# Altium PCB CC2530-Board.PcbDoc
Units mil, origin at the board's own origin, x right, y up, seen from the top; angles counter-clockwise.
Board outline 2808 x 1974 mil, 2 copper layers (Top Layer, Bottom Layer); 45 components, 38 nets, 167 pads, 25 vias.
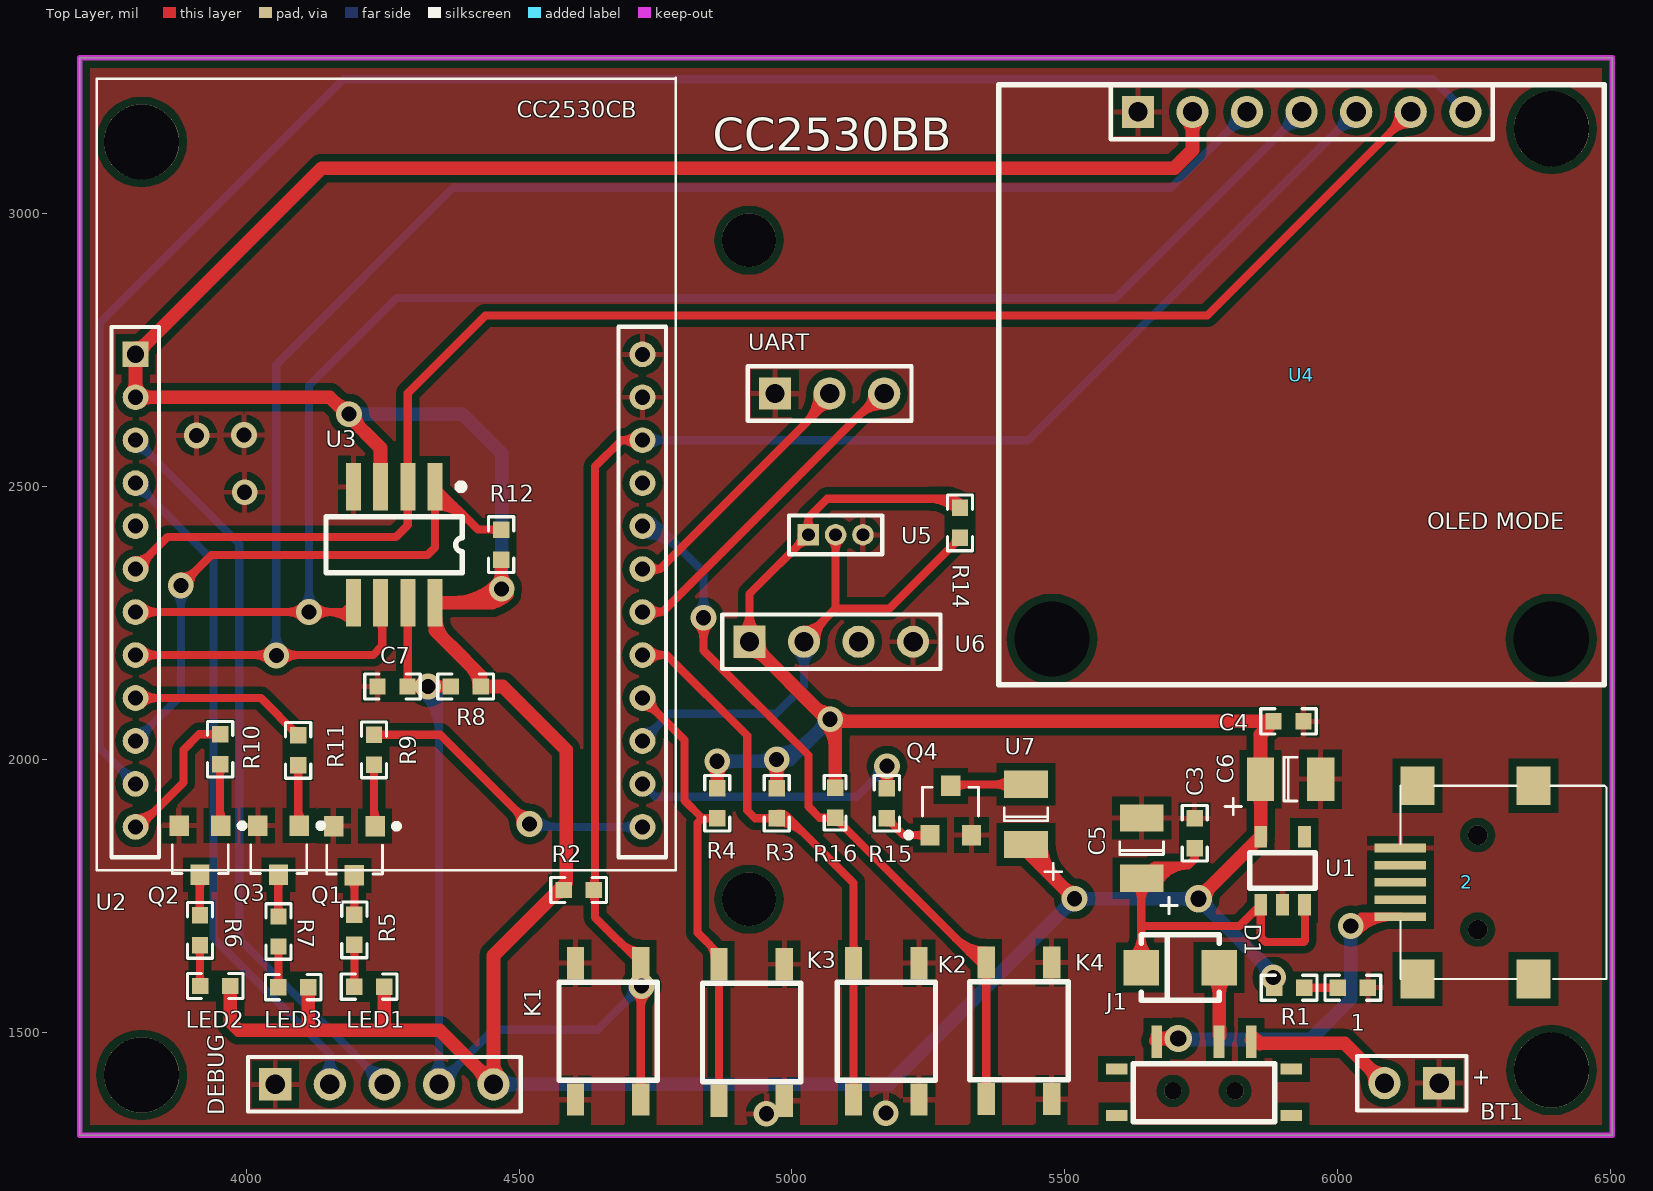
[diagram p0: Top Layer view]
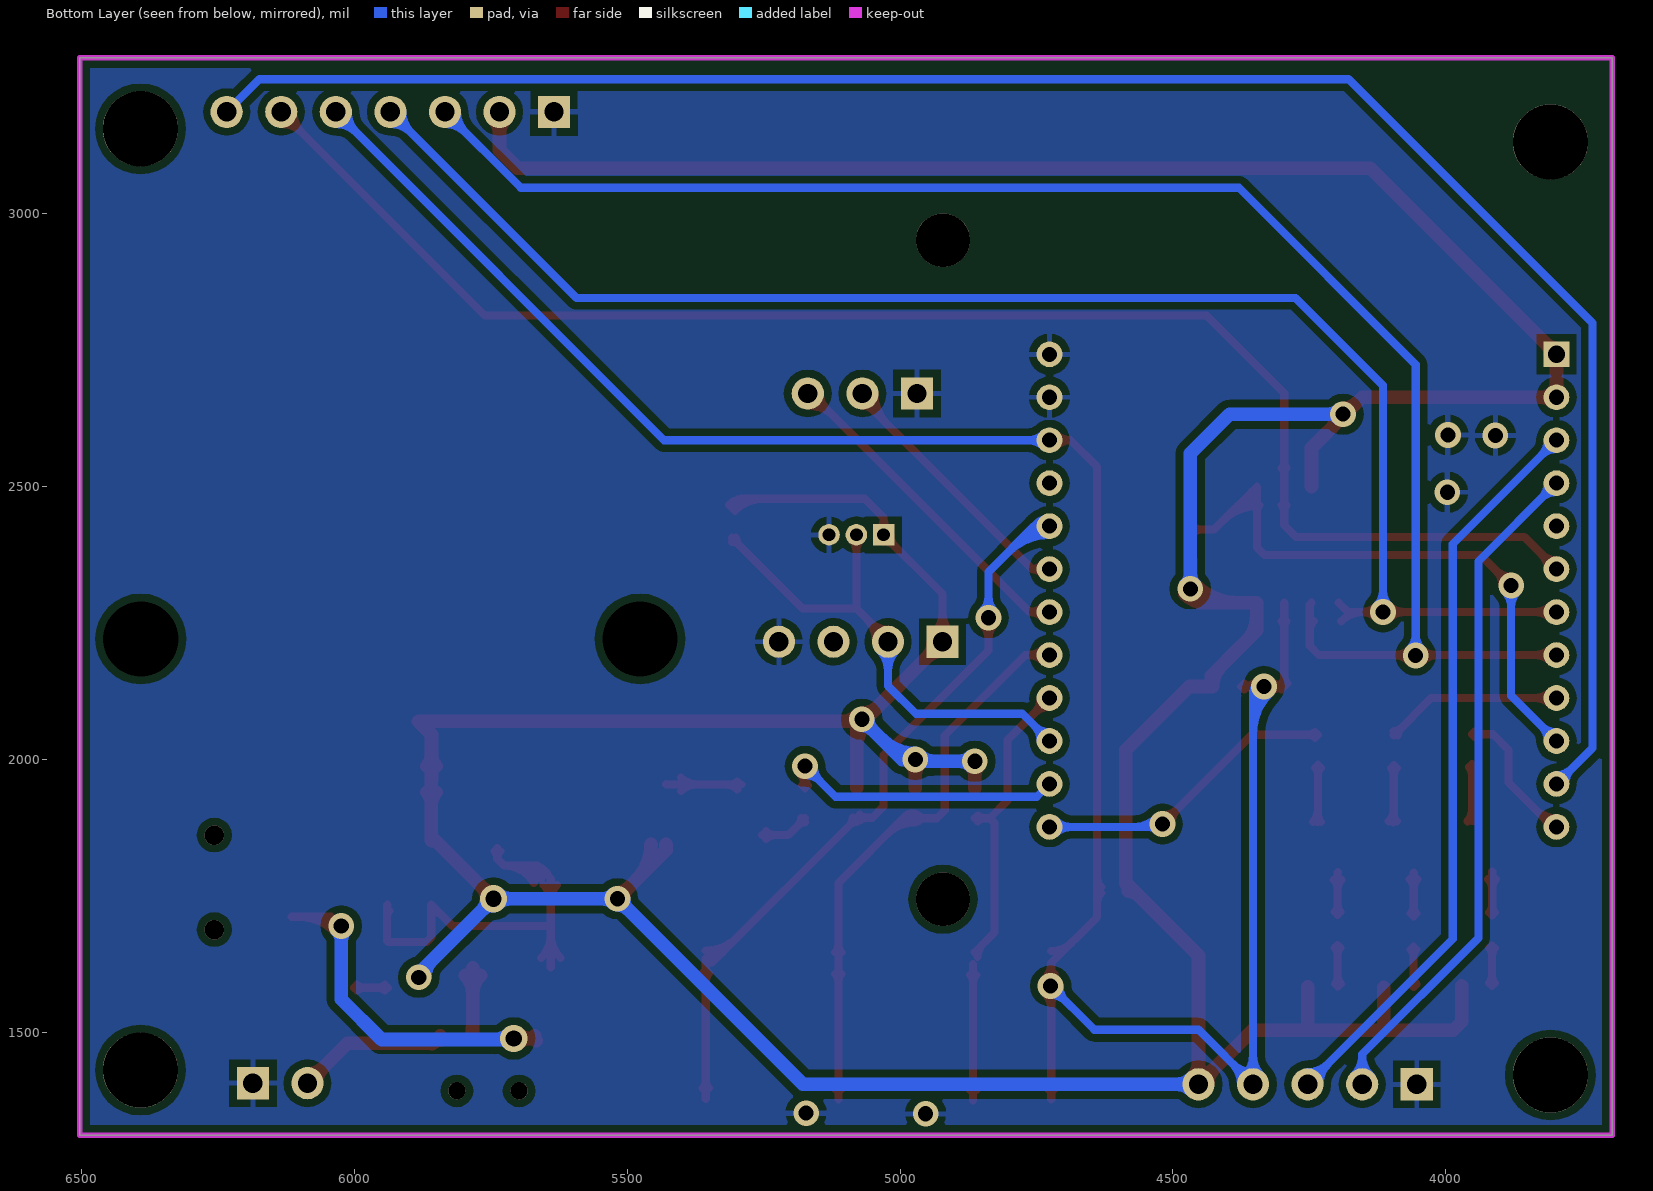
[diagram p1: Bottom Layer view, seen from below]

## Layer stack, top to bottom
Top Layer: signal copper 1.4
Dielectric: dielectric 12.6, FR-4, Dk 4.8
Bottom Layer: signal copper 1.4

## Board outline
3695,3286 3695,1312 6503,1312 6503,3286 3695,3286

## Design rules (kind name [scope] priority, off if disabled: settings)
Clearance Polygon [InPolygon] p1: gap=13.78
Clearance 3.3V [InNamedPolygon ('3V3')] p2: gap=19.68
Clearance [All] p3: gap=9.84
ComponentClearance [All] p1 off: gap=10 collisioncheckmode=3 verticalgap=100000 showdistances=FALSE
HoleToHoleClearance [All] p1: gap=1 allowstackedmicrovias=TRUE
MinimumSolderMaskSliver [All] p1: minsoldermaskwidth=1
PolygonConnect GND [IsVia] p1: connectstyle=Relief reliefconductorwidth=10 reliefentries=4 polygonreliefangle="90 Angle"
PolygonConnect [All] p2: connectstyle=Relief reliefconductorwidth=10 reliefentries=4 polygonreliefangle="90 Angle"
RoutingVias [All] p1: holewidth=28 width=50 viastyle="Through Hole" minholewidth=15.75 minwidth=39.37 maxholewidth=31.5 maxwidth=59.06
SilkToSilkClearance [All] p1: silktosilkclearance=1
SilkscreenOverComponentPads [All] p1: minsilkscreentomaskgap=0
SolderMaskExpansion [All] p1: expansion=4
TestPointUsage [All] p1: valid=0 allowmultiple=FALSE
Testpoint [All] p1: side=15 testpointundercomponent=TRUE minsize=40 maxsize=100 preferedsize=60 minholesize=0 maxholesize=40 preferedholesize=32 testpointgrid=1 style=1023 order=0123456789
Width [All] p1: maxlimit=50 minlimit=10 preferedwidth=10
19 further rules are at their usual default settings.

## Components (designator, comment, footprint, x,y, rotation, side; value= is the part's Value field where it differs from the comment)
1 "LED_SMD" 0603#1 6003,1582 r0 top
2 "USB" MINI-USB 6322,1777 r270 top
BT1 "4.5V" BAT-2 6136,1407 r180 top
C3 "" 0603#1 5738,1890 r270 top
C4 "" 0603#1 5935,2070 r180 top
C5 "10uF" C-1210 5648,1845 r0 top
C6 "10uF" C-1210 5921,1957 r270 top
C7 "" 0603#1 4243,2134 r0 top
D1 "SS14" SS14 5769,1622 r180 top
DEBUG "" HDR1X5 4053,1405 r0 top (schematic designator U9)
J1 "Header 3" Key-7Pin 5885,1443 r180 top
K1 "Mini-Key" MINI-KEY 4651,1521 r0 top
K2 "Mini-Key" MINI-KEY 5185,1483 r180 top
K3 "Mini-Key" MINI-KEY 4938,1481 r180 top
K4 "Mini-Key" MINI-KEY 5428,1484 r180 top
LED1 "LED_SMD" 0603#1 4250,1584 r180 top
LED2 "LED_SMD" 0603#1 3968,1585 r180 top
LED3 "LED_SMD" 0603#1 4111,1583 r180 top
Q1 "NPN_SMD" SOT23-3 4235,1878 r180 top
Q2 "NPN_SMD" SOT23-3 3952,1879 r180 top
Q3 "NPN_SMD" SOT23-3 4096,1879 r180 top
Q4 "NPN_SMD" SOT23-3 5254,1861.74 r0 top
R1 "" 0603#1 5936,1582 r180 top
R2 "" 0603#1 4634,1761 r180 top
R3 "" 0603#1 4972,1895 r90 top
R4 "" 0603#1 4863,1895 r90 top
R5 "" 0603#1 4198,1713 r270 top
R6 "" 0603#1 3915,1712 r270 top
R7 "" 0603#1 4059,1710 r270 top
R8 "" 0603#1 4377,2134 r0 top
R9 "" 0603#1 4234,2043 r270 top
R10 "" 0603#1 3952,2044 r270 top
R11 "" 0603#1 4095,2042 r270 top
R12 "" 0603#1 4467,2419 r270 top
R14 "" 0603#1 5308,2409 r90 top
R15 "" 0603#1 5174,1895 r90 top
R16 "" 0603#2 5055,1911 r0 top
U1 "LDO" SOT23-5 5869,1709 r90 top
U2 "CC2530CB" CC2530CB 3801,2747 r0 top
U3 "M25PE20" M25PE20 4393,2501 r270 top
U4 "OLED" OLED-0.96 5634,3187 r0 top
U5 "DS18B20" MHDR1X3 5030,2412 r0 top
U6 "DHT11" HDR1X4 4922,2216 r0 top
U7 "LIGHT" C-1210 5436,1907 r0 top
UART "Header 3" HDR1X3 4969,2671 r0 top

## Footprints (in the part's own frame and the unit in brackets; to place one, negate y for a bottom-side part, rotate by r counter-clockwise, add the part's x,y. Pads: shape width x height; smd on the part's side, far side on the other; paste and mask are expansions set on the pad)
0603#1 [mil]
  rect 30x30 smd: 1(-2.5,0) 2(52.5,0)
  silkscreen extent -26,-23 76,23
0603#2 [mil]
  rect 30x30 smd: 1(24,-17.5) 2(24,37.5)
  silkscreen extent 4,-40 44,60
BAT-2 [mm] "Multicell Battery; 2 Leads"
  rect 1.5x1.5 hole 0.9: 1(-1.27,0)
  round 1.5 hole 0.9: 2(1.27,0)
  silkscreen extent -2.54,-1.27 2.54,1.27
C-1210 [mil]
  rect 80x50 smd: 1(-7.13,-62.41) 2(-7.13,47.83)
  silkscreen extent -47,-127 58,5
CC2530CB [mm]
  rect 1.2x1.2 hole 0.8: 1(-0.102,-0.107)
  round 1.2 hole 0.7: 2(-0.102,-2.107) 3(-0.102,-4.107) 4(-0.102,-6.107) 5(-0.102,-8.107) 6(-0.102,-10.107) 7(-0.102,-12.107) 8(-0.102,-14.107) 9(-0.102,-16.107) 10(-0.102,-18.107) 11(-0.102,-20.107) 12(-0.102,-22.107) 13(23.495,-22.107) 14(23.495,-20.107) 15(23.495,-18.107) 16(23.495,-16.107) 17(23.495,-14.107) 18(23.495,-12.107) 19(23.495,-10.107) 20(23.495,-8.107) 21(23.495,-6.107) 22(23.495,-4.107) 23(23.495,-2.107) 24(23.495,-0.107)
  silkscreen extent -1.91,-24.13 25.04,12.75
HDR1X3 [mm] "Connector; Header; 3 Position"
  rect 1.5x1.5 hole 0.9: 1(0,0)
  round 1.5 hole 0.9: 2(2.54,0) 3(5.08,0)
  silkscreen extent -1.27,-1.27 6.35,1.27
HDR1X4 [mm] "Connector; Header; 4 Position"
  rect 1.5x1.5 hole 0.9: 1(0,0)
  round 1.5 hole 0.9: 2(2.54,0) 3(5.08,0) 4(7.62,0)
  silkscreen extent -1.27,-1.27 8.89,1.27
HDR1X5 [mm] "Connector; Header; 5 Position"
  rect 1.5x1.5 hole 0.9: 1(0,0)
  round 1.5 hole 0.9: 2(2.54,0) 3(5.08,0) 4(7.62,0) 5(10.16,0)
  silkscreen extent -1.27,-1.27 11.43,1.27
Key-7Pin [mm]
  rect 1x0.5 smd: 0(-0.762,2.413) 0(-0.762,0.254) 0(7.366,0.254) 0(7.366,2.413)
  round 0.8 hole 0.8: 0(1.85,1.27) 0(4.75,1.27)
  rect 0.5x1.5 smd: 1(1.1,-1.016) 2(2.6,-1.016) 3(5.5,-1.016)
  silkscreen extent 0,0 6.6,2.7
M25PE20 [mm]
  rect 2.2x0.7 smd: 1(0.025,-1.194) 2(0.025,-2.464) 3(0.025,-3.734) 4(0.025,-5.004) 5(5.425,-5.004) 6(5.425,-3.734) 7(5.425,-2.464) 8(5.425,-1.194)
  silkscreen extent -0.12,-6.27 4.03,0.16
MHDR1X3 [mm] "Connector; Header; 3 Position"
  rect 1x1 hole 0.6: 1(0,0)
  round 1 hole 0.6: 2(1.27,0) 3(2.54,0)
  silkscreen extent -0.9,-0.9 3.44,0.9
MINI-KEY [mil]
  rect 31.5x59.06 smd: 1(72,-144) 1(72,106) 2(-48,-144) 2(-48,106)
  silkscreen extent -78,-109 102,71
MINI-USB [mm]
  rect 0.4x2.4 smd: 1(1.651,-5.259) 2(0.851,-5.259) 3(0.051,-5.259) 4(-0.749,-5.259) 5(-1.549,-5.259)
  rect 1.8x1.6 smd: 6(-4.449,-4.459) 7(-4.449,0.941) 8(4.551,0.941) 9(4.551,-4.459)
  silkscreen extent -4.45,-5.26 4.55,4.34
OLED-0.96 [mm]
  round 0 hole 3.5: 0(-4,-24.53) 0(19.24,-24.53)
  rect 1.5x1.5 hole 0.9: 1(0,0)
  round 1.5 hole 0.9: 2(2.54,0) 3(5.08,0) 4(7.62,0) 5(10.16,0) 6(12.7,0) 7(15.24,0)
  silkscreen extent -6.48,-26.67 21.72,1.27
SOT23-3 [mm]
  rect 0.9x0.95 smd mask+0.102: 1(-0.025,0) 2(1.905,0) 3(0.94,2.286)
  silkscreen extent -1.15,-0.12 2.23,2.22
SOT23-5 [mm]
  rect 1x0.6 smd: 1(0.635,0.254) 2(0.635,-0.762) 3(0.635,-1.778) 4(3.81,-1.778) 5(3.81,0.254)
  silkscreen extent 1.4,-2.29 3.05,0.76
SS14 [mil]
  rect 65x65 smd: 1(-13.94,3.15) 2(129.06,3.15)
  silkscreen extent -14,-57 129,63

## Part data
1 LED1 LED2 LED3: library part LED_0805
2: library part Mini_USB
BT1: library part Battery, "Multicell Battery"
C3 C4 C7: library part C_0805
C5 C6 U7: library part "Cap Pol", "Polarized Capacitor (Radial)"
D1: library part Diode, "Default Diode"
DEBUG: library part "Header 5", "Header, 5-Pin"
J1 UART: "Header, 3-Pin"
Q1 Q2 Q3 Q4: "NPN Bipolar Transistor"
R1 R2 R3 R4 R5 R6 R7 R8 R9 R10 R11 R12 R14 R15 R16: library part R_0805
U1: library part LDO-3.3
U2: library part "Header 12X2A", "Header, 12-Pin, Dual row"
U4: library part "Header 7", "Header, 7-Pin"
U5: library part MHDR1X3, "Header, 3-Pin"
U6: library part "Header 4", "Header, 4-Pin"

## Free pads (board coordinates)
  round 137.8 hole 137.8 unplated: 0(3808,1422) 0(3808,3132) 0(6392,1431) 0(6392,3156)
  round 98.43 hole 98.43 unplated: 0(4921.26,1744.09) 0(4921.26,2952)

## Via types
v1: diameter 47.24, hole 27.56, Top Layer to Bottom Layer, 21 vias
v2: diameter 35.43, hole 35.43, Top Layer to Bottom Layer, 2 vias
v3: diameter 50, hole 30, Top Layer to Bottom Layer, 2 vias

## Nets (pads, with @x,y where several pads share a name; then routed paths per layer and width w, separated by ;. In a path a pad name is that pad's centre, name@x,y a point inside that pad or via, vN(x,y) a via of type N, cw(c..) or ccw(c..) an arc to the next point about the centre after c; other vN are vias at no path point)
3.3V: C4.2 C6.1 DEBUG.5 LED1.1 LED2.1 LED3.1 R1.2 R2.2 R3.2 R4.2 R8.2 R12.2 R14.2 R16.2 U1.5 U2.1 U2.2 U3.3 U3.8 U4.2 U5.1 U6.1 U7.1 | length 13953.4
  Top Layer w15: U6.1 4922,2304 U5.1 ; U5.1@5031.5,2413.5 U5.1 ; R14.2 5291.5,2478 5064,2478 5030,2444 U5.1 ; 4922,2269.18 cw(c4868.82,2269.18) 4906.42,2231.58 ccw(c4868.82,2269.18) 4922,2269.18 ; 4922,2269.18 ccw(c4975.18,2269.18) 4937.58,2231.58 cw(c4975.18,2269.18) 4922,2269.18 ; 5009.2,2391.2 cw(c5030,2370.4) 5030,2399.82 ccw(c5030,2370.4) 5009.2,2391.2 ; 5009.2,2391.2 ccw(c4988.4,2412) 5017.81,2412 cw(c4988.4,2412) 5009.2,2391.2 ; 5030,2441.42 cw(c5000.58,2441.42) 5021.38,2420.62 ccw(c5000.58,2441.42) 5030,2441.42 ; 5030,2441.42 ccw(c5059.42,2441.42) 5038.62,2420.62 cw(c5059.42,2441.42) 5030,2441.42 ; R14.2@5295.2,2474.3 cw(c5282.39,2461.5) 5300.5,2461.5 ccw(c5282.39,2461.5) R14.2@5295.2,2474.3 ; R14.2@5295.2,2474.3 ccw(c5308,2487.11) 5308,2469 cw(c5308,2487.11) R14.2@5295.2,2474.3 ; 5250.06,2478 cw(c5250.06,2403.56) 5302.7,2456.2 ccw(c5250.06,2403.56) 5250.06,2478 ; 5286.27,2478 cw(c5286.27,2439.77) 5313.3,2466.8 ccw(c5286.27,2439.77) 5286.27,2478
  Top Layer w25: LED2.1 3970.5,1519.5 3986,1504 4111,1504 ; 4112.5,1505.5 4111,1504 ; LED3.1 4113.5,1506.5 4111,1504 ; U3.3 4246,2571 4186,2631 4152.94,2664.06 U2.2 U2.1 4138.2,3084 5701,3084 5734,3117 U4.2 ; LED1.1 4252.5,1505.5 4251,1504 ; 4374,2209 4429.5,2153.5 ; R12.2 4467,2303.54 4450.86,2287.4 U3.8 4346,2237 4429.5,2153.5 ; 4584.5,2019.5 4551,2053 ; R4.2 v1(4863,1997) ; U6.1 v1@5068,2070 ; R3.2 v1(4972,2000) ; R16.2 5079,2059 v1@5068,2070 ; U7.1 5428.87,1834.13 v1(5518,1745) ; v3(5745,1745) U1.5 5859,1963.72 C6.1 5858.59,2046.09 C4.2 v1@5068,2070 ; 3797,2690.91 cw(c3770.15,2690.91) 3789.14,2671.93 ccw(c3770.15,2690.91) 3797,2690.91 ; 3797,2690.91 ccw(c3823.85,2690.91) U2.2@3804.86,2671.93 ; 3797,2690.91 ccw(c3823.85,2690.91) U2.2@3804.86,2671.93 ; 3797,2715.95 cw(c3823.85,2715.95) 3804.86,2734.94 ccw(c3823.85,2715.95) 3797,2715.95 ; 3797,2715.95 ccw(c3770.15,2715.95) 3789.14,2734.94 cw(c3770.15,2715.95) 3797,2715.95 ; U2.2@3804.86,2671.93 ccw(c3823.85,2690.91) 3823.85,2664.06 ; U2.2@3804.86,2671.93 ccw(c3823.85,2690.91) 3823.85,2664.06 ; U2.1@3815.99,2761.79 cw(c3797,2780.78) 3797,2753.93 ccw(c3797,2780.78) U2.1@3815.99,2761.79 ; U2.1@3815.99,2761.79 ccw(c3834.97,2742.8) 3808.12,2742.8 cw(c3834.97,2742.8) U2.1@3815.99,2761.79 ; 3823.85,2664.06 ccw(c3823.85,2637.21) 3804.86,2656.2 cw(c3823.85,2637.21) 3823.85,2664.06 ; 4111,1504 4251,1504 ; 4251,1504 4354,1504 DEBUG.5 4453,1641 4586,1774 4586,2018 4551,2053 ; 4411.44,2171.56 cw(c4373.89,2134) R8.2@4427,2134 ; 4411.44,2171.56 cw(c4373.89,2134) R8.2@4427,2134 ; 4411.44,2171.56 cw(c4373.89,2134) R8.2@4427,2134 ; 4411.44,2171.56 cw(c4373.89,2134) R8.2@4427,2134 ; 4423.93,1434.07 cw(c4394.86,1405) 4435.97,1405 ccw(c4394.86,1405) 4423.93,1434.07 ; 4423.93,1434.07 ccw(c4453,1463.14) 4453,1422.03 cw(c4453,1463.14) 4423.93,1434.07 ; 4429.5,2153.5 R8.2 4470,2134 4551,2053 ; 4453,1446.11 cw(c4411.89,1446.11) 4440.96,1417.04 ccw(c4411.89,1446.11) 4453,1446.11 ; 4453,1446.11 ccw(c4494.11,1446.11) 4465.04,1417.04 cw(c4494.11,1446.11) 4453,1446.11 ; v1@4460.14,2320.86 cw(c4379.35,2401.65) 4379.35,2287.4 ccw(c4379.35,2401.65) v1@4460.14,2320.86 ; v1@4460.14,2320.86 ccw(c4443.56,2337.44) 4467,2337.44 cw(c4443.56,2337.44) v1@4460.14,2320.86 ; 4863,1970.15 cw(c4889.85,1970.15) 4870.86,1989.14 ccw(c4889.85,1970.15) 4863,1970.15 ; 4863,1970.15 ccw(c4836.15,1970.15) 4855.14,1989.14 cw(c4836.15,1970.15) 4863,1970.15 ; U6.1@4951.07,2186.93 cw(c4980.14,2216) 4939.03,2216 ccw(c4980.14,2216) U6.1@4951.07,2186.93 ; U6.1@4951.07,2186.93 ccw(c4922,2157.86) 4922,2198.97 cw(c4922,2157.86) U6.1@4951.07,2186.93 ; 4972,1973.15 cw(c4998.85,1973.15) 4979.86,1992.14 ccw(c4998.85,1973.15) 4972,1973.15 ; 4972,1973.15 ccw(c4945.15,1973.15) 4964.14,1992.14 cw(c4945.15,1973.15) 4972,1973.15 ; 5499.01,1763.99 cw(c5480.03,1745) 5506.88,1745 ccw(c5480.03,1745) 5499.01,1763.99 ; 5499.01,1763.99 ccw(c5518,1782.97) 5518,1756.12 cw(c5518,1782.97) 5499.01,1763.99 ; 5734,3145.89 cw(c5775.11,3145.89) 5746.04,3174.96 ccw(c5775.11,3145.89) 5734,3145.89 ; 5734,3145.89 ccw(c5692.89,3145.89) 5721.96,3174.96 cw(c5692.89,3145.89) 5734,3145.89 ; 5766.34,1766.34 cw(c5745,1787.68) 5745,1757.5 ccw(c5745,1787.68) 5766.34,1766.34 ; 5766.34,1766.34 ccw(c5787.68,1745) 5757.5,1745 cw(c5787.68,1745) 5766.34,1766.34 ; 5858.59,2009.3 cw(c5828.42,2009.3) 5849.76,1987.96 ccw(c5828.42,2009.3) 5858.59,2009.3 ; 5858.59,2009.3 ccw(c5888.77,2009.3) 5867.43,1987.96 cw(c5888.77,2009.3) 5858.59,2009.3 ; 4162.19,2654.81 ccw(c4188,2680.63) 4188,2644.12 cw(c4188,2680.63) 4162.19,2654.81 ; v1@4199.12,2633 ccw(c4235.63,2633) 4209.81,2607.19 cw(c4235.63,2633) v1@4199.12,2633 ; U3.8@4347.28,2257.87 ccw(c4400.76,2257.87) 4362.94,2220.06 cw(c4400.76,2257.87) U3.8@4347.28,2257.87 ; 4439.71,2287.4 ccw(c4439.71,2341.29) 4477.81,2303.19 cw(c4439.71,2341.29) 4439.71,2287.4 ; 4467,2342.27 ccw(c4497.27,2342.27) 4475.86,2320.86 cw(c4497.27,2342.27) 4467,2342.27 ; 4562.72,1750.72 cw(c4581.5,1731.94) 4581.5,1758.5 ccw(c4581.5,1731.94) 4562.72,1750.72 ; R2.2@4579.73,1762.77 ccw(c4564.6,1777.9) 4586,1777.9 cw(c4564.6,1777.9) R2.2@4579.73,1762.77 ; 5040.77,2097.23 ccw(c5070,2126.46) 5070,2085.12 cw(c5070,2126.46) 5040.77,2097.23 ; v1@5062.14,2066.14 cw(c5021.42,2025.42) 5079,2025.42 ccw(c5021.42,2025.42) v1@5062.14,2066.14 ; v1@5077.86,2081.86 ccw(c5106.51,2110.51) 5106.51,2070 cw(c5106.51,2110.51) v1@5077.86,2081.86 ; U7.1@5456.37,1844.59 ccw(c5548.04,1844.59) 5483.22,1779.78 cw(c5548.04,1844.59) U7.1@5456.37,1844.59 ; 5846.73,1846.73 cw(c5859,1834.47) 5859,1851.82 ccw(c5859,1834.47) 5846.73,1846.73 ; C6.1@5849.76,1940.29 cw(c5827.44,1917.97) 5859,1917.97 ccw(c5827.44,1917.97) C6.1@5849.76,1940.29 ; 5859,1919.93 cw(c5887.79,1919.93) 5867.43,1940.29 ccw(c5887.79,1919.93) 5859,1919.93
  Bottom Layer w25: v1(4188,2633) 4396,2633 4468,2561 v1(4468,2313) ; DEBUG.5 5178,1405 v1(5518,1745) v3(5745,1745) 5882,1608 v1(5882,1601) v1@5882,1596 ; v1(4863,1997) 4969,1997 v1(4972,2000) 4996,2000 v1(5070,2074) ; 4214.85,2633 cw(c4214.85,2659.85) 4195.86,2640.86 ccw(c4214.85,2659.85) 4214.85,2633 ; 4214.85,2633 ccw(c4214.85,2606.15) 4195.86,2625.14 cw(c4214.85,2606.15) 4214.85,2633 ; 4468,2339.85 cw(c4441.15,2339.85) 4460.14,2320.86 ccw(c4441.15,2339.85) 4468,2339.85 ; 4468,2339.85 ccw(c4494.85,2339.85) 4475.86,2320.86 cw(c4494.85,2339.85) 4468,2339.85 ; 4494.11,1405 cw(c4494.11,1446.11) 4465.04,1417.04 ccw(c4494.11,1446.11) 4494.11,1405 ; 4494.11,1405 ccw(c4494.11,1363.89) 4465.04,1392.96 cw(c4494.11,1363.89) 4494.11,1405 ; 4889.85,1997 cw(c4889.85,2023.85) 4870.86,2004.86 ccw(c4889.85,2023.85) 4889.85,1997 ; 4889.85,1997 ccw(c4889.85,1970.15) 4870.86,1989.14 cw(c4889.85,1970.15) 4889.85,1997 ; 5051.01,2055.01 cw(c5070,2036.03) 5070,2062.88 ccw(c5070,2036.03) 5051.01,2055.01 ; 5051.01,2055.01 ccw(c5032.03,2074) 5058.88,2074 cw(c5032.03,2074) 5051.01,2055.01 ; 5499.01,1726.01 cw(c5518,1707.03) 5518,1733.88 ccw(c5518,1707.03) 5499.01,1726.01 ; 5499.01,1726.01 ccw(c5480.03,1745) 5506.88,1745 cw(c5480.03,1745) 5499.01,1726.01 ; 5544.85,1745 cw(c5544.85,1771.85) 5525.86,1752.86 ccw(c5544.85,1771.85) 5544.85,1745 ; 5544.85,1745 ccw(c5544.85,1718.15) 5525.86,1737.14 cw(c5544.85,1718.15) 5544.85,1745 ; 5714.82,1745 cw(c5714.82,1714.82) 5736.16,1736.16 ccw(c5714.82,1714.82) 5714.82,1745 ; 5714.82,1745 ccw(c5714.82,1775.18) 5736.16,1753.84 cw(c5714.82,1775.18) 5714.82,1745 ; 5766.34,1723.66 cw(c5787.68,1745) 5757.5,1745 ccw(c5787.68,1745) 5766.34,1723.66 ; 5766.34,1723.66 ccw(c5745,1702.32) 5745,1732.5 cw(c5745,1702.32) 5766.34,1723.66 ; 4937.91,1997 ccw(c4937.91,2034.09) 4964.14,2007.86 cw(c4937.91,2034.09) 4937.91,1997 ; v1@4972,2011.12 ccw(c4972,2095.91) 5031.96,2035.96 cw(c4972,2095.91) v1@4972,2011.12 ; 5858.06,1631.94 cw(c5827.13,1601) 5870.88,1601 ccw(c5827.13,1601) 5858.06,1631.94
GND: 1.2 2.5 BT1.1 C3.1 C4.1 C5.2 C6.2 C7.1 DEBUG.1 K1.2 K2.2 K3.2 K4.2 Q1.2 Q2.2 Q3.2 Q4.2 U1.2 U2.23 U2.24 U3.4 U4.1 U5.3 U6.4 UART.1
  other v1: 4953,1351 5172,1352 3997,2490 3909,2594 3996,2595
Net1_1: 1.1 R1.1 | length 175.8
  Top Layer w15: R1.1 1.1 ; 5956.61,1582 cw(c5956.61,1600.11) 5943.8,1587.3 ccw(c5956.61,1600.11) 5956.61,1582 ; 5956.61,1582 ccw(c5956.61,1563.89) 5943.8,1576.7 cw(c5956.61,1563.89) 5956.61,1582 ; 5982.39,1582 cw(c5982.39,1563.89) 5995.2,1576.7 ccw(c5982.39,1563.89) 5982.39,1582 ; 5982.39,1582 ccw(c5982.39,1600.11) 5995.2,1587.3 cw(c5982.39,1600.11) 5982.39,1582
Net2_1: 2.1 J1.3 | length 1165.5
  Top Layer w15: v1@6025,1694 6043.01,1712.01 2.1 ; v1@6024.79,1694.21 cw(c6067.77,1651.23) 6067.77,1712.01 ccw(c6067.77,1651.23) v1@6024.79,1694.21 ; v1@6035.4,1683.6 cw(c6103.98,1615.02) 6103.98,1712.01 ccw(c6103.98,1615.02) v1@6035.4,1683.6
  Top Layer w25: J1.3@5669.46,1494 5674.46,1489 v3(5708,1489) ; J1.3@5677.82,1489 cw(c5677.82,1458.82) 5699.16,1480.16 ccw(c5677.82,1458.82) J1.3@5677.82,1489 ; J1.3@5677.82,1489 ccw(c5677.82,1519.18) 5699.16,1497.84 cw(c5677.82,1519.18) J1.3@5677.82,1489 ; J1.3@5666.59,1484.88 cw(c5676.53,1474.93) 5676.53,1489 ccw(c5676.53,1474.93) J1.3@5666.59,1484.88
  Bottom Layer w25: v3@5710,1499 5722,1487 5950,1487 6024,1561 v1(6024,1695) ; 6024,1668.15 cw(c6050.85,1668.15) 6031.86,1687.14 ccw(c6050.85,1668.15) 6024,1668.15 ; 6024,1668.15 ccw(c5997.15,1668.15) 6016.14,1687.14 cw(c5997.15,1668.15) 6024,1668.15 ; v3@5716.84,1480.16 cw(c5733.35,1463.65) 5733.35,1487 ccw(c5733.35,1463.65) v3@5716.84,1480.16 ; v3@5716.84,1497.84 ccw(c5743.01,1524.01) 5743.01,1487 cw(c5743.01,1524.01) v3@5716.84,1497.84
NetBT1_2: BT1.2 J1.1 | length 443.9
  Top Layer w25: J1.1@5842.69,1494 5856.69,1480 6013,1480 BT1.2 ; 6056.93,1436.07 cw(c6027.86,1407) 6068.97,1407 ccw(c6027.86,1407) 6056.93,1436.07 ; 6056.93,1436.07 ccw(c6086,1465.14) 6086,1424.03 cw(c6086,1465.14) 6056.93,1436.07 ; J1.1@5841.69,1485.66 cw(c5841.69,1463.1) 5857.64,1479.05 ccw(c5841.69,1463.1) J1.1@5841.69,1485.66
NetC3_2: C3.2 C5.1 D1.2 U1.1 U1.3 | length 1496.2
  Top Layer w15: D1.2 5639.94,1695 ; C3.2 5738,1818 5726,1806 ; U1.3 5940,1733 5940,1668 5938,1666 5868,1666 5859,1675 U1.1 5820,1695 5639.94,1695 ; 5639.94,1679.21 cw(c5579.59,1679.21) 5622.27,1636.53 ccw(c5579.59,1679.21) 5639.94,1679.21 ; 5639.94,1679.21 ccw(c5700.3,1679.21) 5657.62,1636.53 cw(c5700.3,1679.21) 5639.94,1679.21 ; 5639.94,1695 5639.94,1781.67 C5.1 5664.28,1806 5726,1806 ; 5726,1806 ccw(c5726,1742.94) 5671.11,1773.98 cw(c5726,1742.94) 5726,1806 ; 5738,1819.39 cw(c5756.11,1819.39) 5743.3,1832.2 ccw(c5756.11,1819.39) 5738,1819.39 ; 5738,1819.39 ccw(c5719.89,1819.39) 5732.7,1832.2 cw(c5719.89,1819.39) 5738,1819.39 ; C5.1@5628.5,1770.22 cw(c5600.87,1742.59) 5639.94,1742.59 ccw(c5600.87,1742.59) C5.1@5628.5,1770.22 ; 5639.94,1738.1 cw(c5685.37,1738.1) 5653.25,1770.22 ccw(c5685.37,1738.1) 5639.94,1738.1 ; C5.1@5644.99,1788.75 cw(c5674.57,1772.02) 5674.57,1806 ccw(c5674.57,1772.02) C5.1@5644.99,1788.75 ; C5.1@5658.05,1781.36 cw(c5700.28,1757.48) 5700.28,1806 ccw(c5700.28,1757.48) C5.1@5658.05,1781.36 ; 5838.2,1713.2 cw(c5859,1692.4) 5859,1721.82 ccw(c5859,1692.4) 5838.2,1713.2 ; U1.3@5935.95,1723.08 cw(c5926.18,1713.3) 5940,1713.3 ccw(c5926.18,1713.3) U1.3@5935.95,1723.08
NetLED1_2: LED1.2 R5.2 | length 190.5
  Top Layer w15: LED1.2 4198,1584.5 R5.2 ; 4198,1642.39 cw(c4216.11,1642.39) 4203.3,1655.2 ccw(c4216.11,1642.39) 4198,1642.39 ; 4198,1642.39 ccw(c4179.89,1642.39) 4192.7,1655.2 cw(c4179.89,1642.39) 4198,1642.39 ; LED1.2@4192.2,1589.3 ccw(c4178.19,1603.31) 4198,1603.31 cw(c4178.19,1603.31) LED1.2@4192.2,1589.3 ; 4198,1600.9 ccw(c4214.4,1600.9) 4202.8,1589.3 cw(c4214.4,1600.9) 4198,1600.9
NetLED2_2: LED2.2 R6.2 | length 187.8
  Top Layer w15: LED2.2@3915,1585.5 R6.2 ; 3915,1641.39 cw(c3933.11,1641.39) 3920.3,1654.2 ccw(c3933.11,1641.39) 3915,1641.39 ; 3915,1641.39 ccw(c3896.89,1641.39) 3909.7,1654.2 cw(c3896.89,1641.39) 3915,1641.39 ; LED2.2@3910.2,1590.3 ccw(c3898.6,1601.9) 3915,1601.9 cw(c3898.6,1601.9) LED2.2@3910.2,1590.3 ; 3915,1604.31 ccw(c3934.81,1604.31) 3920.8,1590.3 cw(c3934.81,1604.31) 3915,1604.31
NetLED3_2: LED3.2 R7.2 | length 188.5
  Top Layer w15: LED3.2 4059,1583.5 R7.2 ; 4059,1639.39 cw(c4077.11,1639.39) 4064.3,1652.2 ccw(c4077.11,1639.39) 4059,1639.39 ; 4059,1639.39 ccw(c4040.89,1639.39) 4053.7,1652.2 cw(c4040.89,1639.39) 4059,1639.39 ; LED3.2@4053.2,1588.3 ccw(c4039.19,1602.31) 4059,1602.31 cw(c4039.19,1602.31) LED3.2@4053.2,1588.3 ; 4059,1599.9 ccw(c4075.4,1599.9) 4063.8,1588.3 cw(c4075.4,1599.9) 4059,1599.9
NetQ1_1: Q1.1 R9.2 | length 239
  Top Layer w15: R9.2 4234,1887.26 Q1.1@4235,1886.26 ; 4234,1972.39 cw(c4252.11,1972.39) 4239.3,1985.2 ccw(c4252.11,1972.39) 4234,1972.39 ; 4234,1972.39 ccw(c4215.89,1972.39) 4228.7,1985.2 cw(c4215.89,1972.39) 4234,1972.39 ; Q1.1@4228.78,1886.21 ccw(c4216.16,1898.82) 4234,1898.82 cw(c4216.16,1898.82) Q1.1@4228.78,1886.21 ; 4234,1908.48 ccw(c4265.49,1908.48) 4243.22,1886.21 cw(c4265.49,1908.48) 4234,1908.48
NetQ1_3: Q1.3 R5.1 | length 212.8
  Top Layer w15: Q1.3@4197.6,1793.74 4198,1793.34 R5.1 ; 4198,1733.61 cw(c4179.89,1733.61) 4192.7,1720.8 ccw(c4179.89,1733.61) 4198,1733.61 ; 4198,1733.61 ccw(c4216.11,1733.61) 4203.3,1720.8 cw(c4216.11,1733.61) 4198,1733.61 ; 4198,1762.35 cw(c4222.66,1762.35) 4205.22,1779.79 ccw(c4222.66,1762.35) 4198,1762.35 ; 4198,1762.35 ccw(c4173.34,1762.35) 4190.78,1779.79 cw(c4173.34,1762.35) 4198,1762.35
NetQ2_1: Q2.1 R10.2 | length 238.6
  Top Layer w15: Q2.1@3952,1887.26 R10.2 ; 3952,1973.39 cw(c3970.11,1973.39) 3957.3,1986.2 ccw(c3970.11,1973.39) 3952,1973.39 ; 3952,1973.39 ccw(c3933.89,1973.39) 3946.7,1986.2 cw(c3933.89,1973.39) 3952,1973.39 ; Q2.1@3945.78,1887.21 ccw(c3930.75,1902.23) 3952,1902.23 cw(c3930.75,1902.23) Q2.1@3945.78,1887.21 ; 3952,1907.06 ccw(c3980.08,1907.06) 3960.22,1887.21 cw(c3980.08,1907.06) 3952,1907.06
NetQ2_3: Q2.3 R6.1 | length 214.8
  Top Layer w15: Q2.3@3914.6,1794.74 3914.6,1714.9 R6.1 ; Q2.3@3907.78,1780.79 cw(c3891.31,1764.32) 3914.6,1764.32 ccw(c3891.31,1764.32) Q2.3@3907.78,1780.79 ; R6.1@3909.7,1719.8 ccw(c3897.86,1731.64) 3914.6,1731.64 cw(c3897.86,1731.64) R6.1@3909.7,1719.8 ; 3914.6,1733.58 ccw(c3934.08,1733.58) 3920.3,1719.8 cw(c3934.08,1733.58) 3914.6,1733.58 ; 3914.6,1762.38 cw(c3940.63,1762.38) 3922.22,1780.79 ccw(c3940.63,1762.38) 3914.6,1762.38
NetQ3_1: Q3.1 R11.2 | length 239
  Top Layer w15: R11.2 4095,1886.26 Q3.1@4096,1885.26 ; 4095,1971.39 cw(c4113.11,1971.39) 4100.3,1984.2 ccw(c4113.11,1971.39) 4095,1971.39 ; 4095,1971.39 ccw(c4076.89,1971.39) 4089.7,1984.2 cw(c4076.89,1971.39) 4095,1971.39 ; Q3.1@4089.78,1887.21 ccw(c4077.16,1899.82) 4095,1899.82 cw(c4077.16,1899.82) Q3.1@4089.78,1887.21 ; 4095,1909.48 ccw(c4126.49,1909.48) 4104.22,1887.21 cw(c4126.49,1909.48) 4095,1909.48
NetQ3_3: Q3.3 R7.1 | length 214.8
  Top Layer w15: Q3.3@4058.6,1792.74 4058.6,1712.9 R7.1 ; Q3.3@4051.78,1780.79 cw(c4035.31,1764.32) 4058.6,1764.32 ccw(c4035.31,1764.32) Q3.3@4051.78,1780.79 ; R7.1@4053.7,1717.8 ccw(c4041.86,1729.64) 4058.6,1729.64 cw(c4041.86,1729.64) R7.1@4053.7,1717.8 ; 4058.6,1731.58 ccw(c4078.08,1731.58) 4064.3,1717.8 cw(c4078.08,1731.58) 4058.6,1731.58 ; 4058.6,1762.38 cw(c4084.63,1762.38) 4066.22,1780.79 ccw(c4084.63,1762.38) 4058.6,1762.38
NetQ4_1: Q4.1 R15.1 | length 226.1
  Top Layer w15: R15.1 5204.76,1861.74 Q4.1 ; R15.1@5186.8,1879.7 cw(c5199.61,1892.5) 5181.5,1892.5 ccw(c5199.61,1892.5) R15.1@5186.8,1879.7 ; R15.1@5186.8,1879.7 ccw(c5174,1866.89) 5174,1885 cw(c5174,1866.89) R15.1@5186.8,1879.7 ; 5228.34,1861.74 cw(c5228.34,1837.08) 5245.78,1854.52 ccw(c5228.34,1837.08) 5228.34,1861.74 ; 5228.34,1861.74 ccw(c5228.34,1886.4) 5245.78,1868.96 cw(c5228.34,1886.4) 5228.34,1861.74
NetQ4_3: Q4.3 U7.2 | length 348.3
  Top Layer w15: Q4.3@5291,1954.26 5428.3,1954.26 U7.2 ; Q4.3@5298.22,1945.5 cw(c5319.37,1924.35) 5319.37,1954.26 ccw(c5319.37,1924.35) Q4.3@5298.22,1945.5 ; Q4.3@5298.22,1959.95 ccw(c5311.96,1973.68) 5311.96,1954.26 cw(c5311.96,1973.68) Q4.3@5298.22,1959.95 ; 5370.25,1954.26 ccw(c5370.25,1998.46) 5401.5,1967.21 cw(c5370.25,1998.46) 5370.25,1954.26 ; 5373,1954.26 cw(c5373,1913.96) 5401.5,1942.46 ccw(c5373,1913.96) 5373,1954.26
NRST: C7.2 DEBUG.4 K1.1 R2.1 R8.1 U2.22 U3.7 U4.5 | length 6468.8
  Top Layer w15: U3.7 4296,2134.5 C7.2 ; R8.1 v1(4333,2134) C7.2 ; K1.1@4723,1377 4723,1627 4639,1711 4639,2537 4687.32,2585.32 U2.22 ; C7.2 cw(c4295.5,2098.45) 4321.3,2122.91 ccw(c4295.5,2098.45) C7.2 ; C7.2 ccw(c4295.5,2169.55) 4321.3,2145.09 cw(c4295.5,2169.55) C7.2 ; 4296,2242.71 cw(c4311.16,2242.71) 4300.44,2253.43 ccw(c4311.16,2242.71) 4296,2242.71 ; 4296,2242.71 ccw(c4280.84,2242.71) 4291.56,2253.43 cw(c4280.84,2242.71) 4296,2242.71 ; C7.2@4300.8,2139.3 ccw(c4313.61,2152.11) v1@4313.61,2134 ; C7.2@4300.8,2139.3 cw(c4312.4,2150.9) 4296,2150.9 ccw(c4312.4,2150.9) C7.2@4300.8,2139.3 ; C7.2@4300.8,2139.3 ccw(c4313.61,2152.11) v1@4313.61,2134 ; v1@4313.61,2134 ccw(c4313.61,2115.89) 4300.8,2128.7 cw(c4313.61,2115.89) v1@4313.61,2134 ; v1@4356.39,2134 cw(c4356.39,2115.89) 4369.2,2128.7 ccw(c4356.39,2115.89) v1@4356.39,2134 ; v1@4356.39,2134 ccw(c4356.39,2152.11) 4369.2,2139.3 cw(c4356.39,2152.11) v1@4356.39,2134 ; R8.1@4371.92,2134 cw(c4371.92,2172.92) 4344.4,2145.4 ccw(c4371.92,2172.92) R8.1@4371.92,2134 ; R8.1@4371.92,2134 ccw(c4371.92,2095.08) 4344.4,2122.6 cw(c4371.92,2095.08) R8.1@4371.92,2134 ; 4687.33,2585.32 cw(c4687.33,2547) 4714.55,2573.97 ccw(c4687.33,2547) 4687.33,2585.32 ; 4687.33,2585.32 ccw(c4687.33,2623.65) 4714.55,2596.67 cw(c4687.33,2623.65) 4687.33,2585.32 ; 4723,1410.69 cw(c4703.09,1410.69) 4717.17,1396.61 ccw(c4703.09,1410.69) 4723,1410.69 ; 4723,1410.69 ccw(c4742.91,1410.69) 4728.83,1396.61 cw(c4742.91,1410.69) 4723,1410.69 ; v1@4723,1593.31 cw(c4742.91,1593.31) 4728.83,1607.39 ccw(c4742.91,1593.31) v1@4723,1593.31 ; v1@4723,1593.31 ccw(c4703.09,1593.31) 4717.17,1607.39 cw(c4703.09,1593.31) v1@4723,1593.31 ; C7.2@4290.2,2139.3 ccw(c4276.19,2153.31) 4296,2153.31 cw(c4276.19,2153.31) C7.2@4290.2,2139.3 ; R2.1@4631.2,1755.7 cw(c4612.36,1736.86) 4639,1736.86 ccw(c4612.36,1736.86) R2.1@4631.2,1755.7 ; R2.1@4631.2,1766.3 ccw(c4612.36,1785.14) 4639,1785.14 cw(c4612.36,1785.14) R2.1@4631.2,1766.3 ; 4685.4,1664.6 ccw(c4723,1702.21) 4723,1649.03 cw(c4723,1702.21) 4685.4,1664.6 ; v1@4712.6,1573.6 cw(c4687.49,1548.49) 4723,1548.49 ccw(c4687.49,1548.49) v1@4712.6,1573.6 ; v1@4712.6,1596.4 ccw(c4687.49,1621.51) 4723,1621.51 cw(c4687.49,1621.51) v1@4712.6,1596.4 ; 4723,1543.66 cw(c4765.34,1543.66) 4735.4,1573.6 ccw(c4765.34,1543.66) 4723,1543.66 ; K1.1@4723,1626.34 ccw(c4765.34,1626.34) 4735.4,1596.4 cw(c4765.34,1626.34) K1.1@4723,1626.34
  Bottom Layer w15: v1(4333,2134) 4353,2114 DEBUG.4 4453,1505 4644,1505 v1(4724,1585) ; U2.22 5432.32,2585.32 U4.5 ; 4353,1458.18 cw(c4299.82,1458.18) 4337.42,1420.58 ccw(c4299.82,1458.18) 4353,1458.18 ; 4353,1458.18 ccw(c4406.18,1458.18) 4368.58,1420.58 cw(c4406.18,1458.18) 4353,1458.18 ; 4390.6,1442.6 cw(c4353,1480.21) 4353,1427.03 ccw(c4353,1480.21) 4390.6,1442.6 ; 4390.6,1442.6 ccw(c4428.21,1405) 4375.03,1405 cw(c4428.21,1405) 4390.6,1442.6 ; 4696.48,1557.48 cw(c4724,1529.96) 4724,1568.88 ccw(c4724,1529.96) 4696.48,1557.48 ; 4696.48,1557.48 ccw(c4668.96,1585) 4707.88,1585 cw(c4668.96,1585) 4696.48,1557.48 ; 4764.92,2585.32 cw(c4764.92,2624.24) 4737.4,2596.72 ccw(c4764.92,2624.24) 4764.92,2585.32 ; 4764.92,2585.32 ccw(c4764.92,2546.4) 4737.4,2573.92 cw(c4764.92,2546.4) 4764.92,2585.32 ; 5996.4,3149.4 cw(c6034,3111.79) 6034,3164.97 ccw(c6034,3111.79) 5996.4,3149.4 ; 5996.4,3149.4 ccw(c5958.79,3187) 6011.97,3187 cw(c5958.79,3187) 5996.4,3149.4 ; v1@4321.6,2122.6 cw(c4245.79,2046.79) 4353,2046.79 ccw(c4245.79,2046.79) v1@4321.6,2122.6 ; v1@4332.21,2133.21 cw(c4282.01,2083.01) 4353,2083.01 ccw(c4282.01,2083.01) v1@4332.21,2133.21 ; v1@4342.81,2143.81 cw(c4318.22,2119.22) 4353,2119.22 ccw(c4318.22,2119.22) v1@4342.81,2143.81
P00: U2.21
P01/BUT0: K4.1 R16.1 U2.20 | length 2568.1
  Top Layer w15: v1(4838,2260) 4838,2200 5030,2008 5030,1914 5050.5,1893.5 R16.1 5344.5,1628 5356,1628 K4.1@5356,1378 ; 4838,2221.08 cw(c4876.92,2221.08) 4849.4,2248.6 ccw(c4876.92,2221.08) 4838,2221.08 ; 4838,2221.08 ccw(c4799.08,2221.08) 4826.6,2248.6 cw(c4799.08,2221.08) 4838,2221.08 ; 5060.89,1893.5 cw(c5060.89,1875.39) 5073.7,1888.2 ccw(c5060.89,1875.39) 5060.89,1893.5 ; 5060.89,1893.5 ccw(c5060.89,1911.61) 5073.7,1898.8 cw(c5060.89,1911.61) 5060.89,1893.5 ; R16.1@5091.8,1880.7 cw(c5104.61,1893.5) 5086.5,1893.5 ccw(c5104.61,1893.5) R16.1@5091.8,1880.7 ; R16.1@5091.8,1880.7 ccw(c5079,1867.89) 5079,1886 cw(c5079,1867.89) R16.1@5091.8,1880.7 ; 5356,1411.69 cw(c5336.09,1411.69) 5350.17,1397.61 ccw(c5336.09,1411.69) 5356,1411.69 ; 5356,1411.69 ccw(c5375.91,1411.69) 5361.83,1397.61 cw(c5375.91,1411.69) 5356,1411.69 ; 5356,1594.31 cw(c5375.91,1594.31) 5361.83,1608.39 ccw(c5375.91,1594.31) 5356,1594.31 ; 5356,1594.31 ccw(c5336.09,1594.31) 5350.17,1608.39 cw(c5336.09,1594.31) 5356,1594.31 ; 5298.77,1673.74 ccw(c5356,1730.97) 5356,1650.03 cw(c5356,1730.97) 5298.77,1673.74 ; 5324.37,1648.13 ccw(c5356,1679.76) 5356,1635.03 cw(c5356,1679.76) 5324.37,1648.13
  Bottom Layer w15: U2.20 4754.16,2427.84 ; v1@4838,2261 4838,2344 4754.16,2427.84 ; 4754.16,2427.84 cw(c4754.16,2444.37) 4739.9,2436 ccw(c4754.16,2444.37) 4754.16,2427.84 ; 4754.16,2427.84 ccw(c4754.16,2411.32) 4739.9,2419.68 cw(c4754.16,2411.32) 4754.16,2427.84 ; 4838,2298.92 cw(c4799.08,2298.92) 4826.6,2271.4 ccw(c4799.08,2298.92) 4838,2298.92 ; 4838,2298.92 ccw(c4876.92,2298.92) 4849.4,2271.4 cw(c4876.92,2298.92) 4838,2298.92 ; U2.20@4726,2411.72 cw(c4726,2304.82) 4801.59,2380.41 ccw(c4726,2304.82) U2.20@4726,2411.72 ; U2.20@4726,2426.72 cw(c4726,2356.04) 4775.98,2406.02 ccw(c4726,2356.04) U2.20@4726,2426.72 ; U2.20@4726,2441.72 cw(c4726,2407.25) 4750.38,2431.62 ccw(c4726,2407.25) U2.20@4726,2441.72 ; U2.20@4726.71,2426.97 cw(c4740.79,2409.76) 4756.51,2425.49 ccw(c4740.79,2409.76) U2.20@4726.71,2426.97 ; U2.20@4736.21,2415.36 cw(c4751.34,2396.87) 4768.23,2413.77 ccw(c4751.34,2396.87) U2.20@4736.21,2415.36
P02/RX: U2.19 UART.2 | length 807.2
  Top Layer w15: U2.19 4758.1,2349.1 ; UART.2 5069,2660 4758.1,2349.1 ; 4758.1,2349.1 cw(c4758.1,2373) 4738.93,2358.73 ccw(c4758.1,2373) 4758.1,2349.1 ; 4758.1,2349.1 ccw(c4758.1,2325.21) 4738.93,2339.47 cw(c4758.1,2325.21) 4758.1,2349.1 ; 5023.62,2614.62 ccw(c4967.24,2671) 5046.97,2671 cw(c4967.24,2671) 5023.62,2614.62 ; 5049.23,2640.23 ccw(c5018.45,2671) 5061.97,2671 cw(c5018.45,2671) 5049.23,2640.23 ; 5050.17,2641.17 cw(c5069,2622.35) 5069,2648.97 ccw(c5069,2622.35) 5050.17,2641.17
P03/TX: U2.18 UART.3 | length 886.3
  Top Layer w15: U2.18 4762.42,2270.36 ; UART.3 5163.06,2671 4762.42,2270.36 ; 4762.42,2270.36 cw(c4762.42,2303.43) 4737.94,2281.2 ccw(c4762.42,2303.43) 4762.42,2270.36 ; 4762.42,2270.36 ccw(c4762.42,2237.3) 4737.94,2259.52 cw(c4762.42,2237.3) 4762.42,2270.36 ; 5121.25,2629.19 cw(c5169,2581.44) 5169,2648.97 ccw(c5169,2581.44) 5121.25,2629.19 ; 5135.6,2643.55 ccw(c5108.15,2671) 5146.97,2671 cw(c5108.15,2671) 5135.6,2643.55
P04/BUT1: K2.1 R3.1 U2.17 | length 1746.5
  Top Layer w15: U2.17 4770.38,2191.62 4918,2044 4918,1907 4932.5,1892.5 R3.1 4994.5,1892.5 5113,1774 5113,1627 K2.1@5113,1377 ; 4764.92,2191.62 cw(c4764.92,2230.54) 4737.4,2203.02 ccw(c4764.92,2230.54) 4764.92,2191.62 ; 4764.92,2191.62 ccw(c4764.92,2152.7) 4737.4,2180.22 cw(c4764.92,2152.7) 4764.92,2191.62 ; 4953.89,1892.5 cw(c4953.89,1874.39) 4966.7,1887.2 ccw(c4953.89,1874.39) 4953.89,1892.5 ; 4953.89,1892.5 ccw(c4953.89,1910.61) 4966.7,1897.8 cw(c4953.89,1910.61) 4953.89,1892.5 ; 4990.11,1892.5 cw(c4990.11,1910.61) 4977.3,1897.8 ccw(c4990.11,1910.61) 4990.11,1892.5 ; 4990.11,1892.5 ccw(c4990.11,1874.39) 4977.3,1887.2 cw(c4990.11,1874.39) 4990.11,1892.5 ; 5113,1410.69 cw(c5093.09,1410.69) 5107.17,1396.61 ccw(c5093.09,1410.69) 5113,1410.69 ; 5113,1410.69 ccw(c5132.91,1410.69) 5118.83,1396.61 cw(c5132.91,1410.69) 5113,1410.69 ; 5113,1593.31 cw(c5132.91,1593.31) 5118.83,1607.39 ccw(c5132.91,1593.31) 5113,1593.31 ; 5113,1593.31 ccw(c5093.09,1593.31) 5107.17,1607.39 cw(c5093.09,1593.31) 5113,1593.31 ; 5113,1660.69 cw(c5093.09,1660.69) 5107.17,1646.61 ccw(c5093.09,1660.69) 5113,1660.69 ; 5113,1660.69 ccw(c5132.91,1660.69) 5118.83,1646.61 cw(c5132.91,1660.69) 5113,1660.69 ; R3.1@4968.52,1899.14 cw(c4977.56,1881.9) 4991.33,1895.67 ccw(c4977.56,1881.9) R3.1@4968.52,1899.14 ; R3.1@4972,1885 cw(c4972,1812.57) 5023.21,1863.79 ccw(c4972,1812.57) R3.1@4972,1885 ; R3.1@4972,1900 cw(c4972,1863.79) 4997.61,1889.39 ccw(c4972,1863.79) R3.1@4972,1900 ; R3.1@4975.48,1885.86 cw(c4987.49,1862.99) 5005.75,1881.25 ccw(c4987.49,1862.99) R3.1@4975.48,1885.86
P05/BUT2: K3.1 R4.1 U2.16 | length 1134.1
  Top Layer w15: U2.16 4803,2035.88 4803,1925 4835.5,1892.5 ; R4.1@4857.7,1887.2 ccw(c4844.89,1874.39) 4844.89,1892.5 ccw(c4844.89,1910.61) R4.1@4857.7,1897.8 ; K3.1@4863,1647 4827,1683 4827,1884 4835.5,1892.5 ; R4.1 4835.5,1892.5 ; K3.1@4866,1375 K3.1@4866,1625 ; 4753.52,2085.36 cw(c4781.04,2112.88) 4742.12,2112.88 ccw(c4781.04,2112.88) 4753.52,2085.36 ; 4753.52,2085.36 ccw(c4726,2057.84) 4726,2096.76 cw(c4726,2057.84) 4753.52,2085.36 ; 4866,1408.69 cw(c4846.09,1408.69) 4860.17,1394.61 ccw(c4846.09,1408.69) 4866,1408.69 ; 4866,1408.69 ccw(c4885.91,1408.69) 4871.83,1394.61 cw(c4885.91,1408.69) 4866,1408.69 ; 4866,1591.31 cw(c4885.91,1591.31) 4871.83,1605.39 ccw(c4885.91,1591.31) 4866,1591.31 ; 4866,1591.31 ccw(c4846.09,1591.31) 4860.17,1605.39 cw(c4846.09,1591.31) 4866,1591.31 ; 4848.23,1661.77 cw(c4825.24,1638.78) 4857.75,1638.78 ccw(c4825.24,1638.78) 4848.23,1661.77
P06/1-WIRE: R14.1 U2.15 U5.2 U6.2 | length 1535.3
  Top Layer w15: U6.2 5022,2219 5080,2277 ; U5.2@5086.5,2418.5 U5.2 5080,2277 ; R14.1 5178.5,2277 5080,2277 ; 5080,2382.58 cw(c5109.42,2382.58) 5088.62,2403.38 ccw(c5109.42,2382.58) 5080,2382.58 ; 5080,2382.58 ccw(c5050.58,2382.58) 5071.38,2403.38 cw(c5050.58,2382.58) 5080,2382.58 ; R14.1@5295.2,2393.7 cw(c5308,2380.89) 5308,2399 ccw(c5308,2380.89) R14.1@5295.2,2393.7 ; R14.1@5295.2,2393.7 ccw(c5282.39,2406.5) 5300.5,2406.5 cw(c5282.39,2406.5) R14.1@5295.2,2393.7 ; U6.2@5022,2238.03 ccw(c5022,2283.96) 5054.48,2251.48 cw(c5022,2283.96) U6.2@5022,2238.03 ; U6.2@5044.03,2216 cw(c5104.45,2216) 5061.72,2258.72 ccw(c5104.45,2216) U6.2@5044.03,2216
  Bottom Layer w15: U2.15 4775.86,2084 4971,2084 5022,2135 U6.2 ; 4753.52,2061.66 cw(c4726,2089.19) 4726,2050.26 ccw(c4726,2089.19) 4753.52,2061.66 ; 4753.52,2061.66 ccw(c4781.04,2034.14) 4742.12,2034.14 cw(c4781.04,2034.14) 4753.52,2061.66 ; 5022,2162.82 cw(c5075.18,2162.82) 5037.58,2200.42 ccw(c5075.18,2162.82) 5022,2162.82 ; 5022,2162.82 ccw(c4968.82,2162.82) 5006.42,2200.42 cw(c4968.82,2162.82) 5022,2162.82
P07/LIGHT: R15.2 U2.14 | length 822.8
  Top Layer w15: R15.2 v1(5174,1988) ; R15.2@5174,1949.08 cw(c5212.92,1949.08) 5185.4,1976.6 ccw(c5212.92,1949.08) R15.2@5174,1949.08 ; R15.2@5174,1949.08 ccw(c5135.08,1949.08) 5162.6,1976.6 cw(c5135.08,1949.08) R15.2@5174,1949.08 ; v1@5174,1965.61 cw(c5155.89,1965.61) 5168.7,1952.8 ccw(c5155.89,1965.61) v1@5174,1965.61 ; v1@5174,1965.61 ccw(c5192.11,1965.61) 5179.3,1952.8 cw(c5192.11,1965.61) v1@5174,1965.61
  Bottom Layer w15: U2.14 4749.4,1932 5118,1932 v1(5174,1988) ; 5146.48,1960.48 cw(c5174,1932.96) 5174,1971.88 ccw(c5174,1932.96) 5146.48,1960.48 ; 5146.48,1960.48 ccw(c5118.96,1988) 5157.88,1988 cw(c5118.96,1988) 5146.48,1960.48
P10/LED1: R9.1 U2.13 | length 985.7
  Top Layer w15: R9.1 4355.5,2045.5 v1(4519,1882) ; 4252.11,2045.5 cw(c4252.11,2063.61) 4239.3,2050.8 ccw(c4252.11,2063.61) 4252.11,2045.5 ; 4252.11,2045.5 ccw(c4252.11,2027.39) 4239.3,2040.2 cw(c4252.11,2027.39) 4252.11,2045.5 ; 4491.48,1909.52 cw(c4463.96,1882) 4502.88,1882 ccw(c4463.96,1882) 4491.48,1909.52 ; 4491.48,1909.52 ccw(c4519,1937.04) 4519,1898.12 cw(c4519,1937.04) 4491.48,1909.52
  Bottom Layer w15: v1(4519,1882) 4524.34,1876.66 U2.13 ; 4687.08,1876.66 cw(c4687.08,1837.74) 4714.6,1865.26 ccw(c4687.08,1837.74) 4687.08,1876.66 ; 4687.08,1876.66 ccw(c4687.08,1915.58) 4714.6,1888.06 cw(c4687.08,1915.58) 4687.08,1876.66 ; v1@4530.4,1870.6 cw(c4545.03,1855.97) 4545.03,1876.66 ccw(c4545.03,1855.97) v1@4530.4,1870.6 ; v1@4530.4,1893.4 ccw(c4570.81,1933.81) 4570.81,1876.66 cw(c4570.81,1933.81) v1@4530.4,1893.4
P11/LED2: R10.1 U2.12 | length 439.7
  Top Layer w15: U2.12 3803.66,1876.66 3885,1958 3885,2018 3913.5,2046.5 R10.1 ; 3933.89,2046.5 cw(c3933.89,2028.39) 3946.7,2041.2 ccw(c3933.89,2028.39) 3933.89,2046.5 ; 3933.89,2046.5 ccw(c3933.89,2064.61) 3946.7,2051.8 cw(c3933.89,2064.61) 3933.89,2046.5 ; U2.12@3797,1892.78 ccw(c3797,1947.79) 3835.89,1908.89 cw(c3797,1947.79) U2.12@3797,1892.78 ; U2.12@3813.12,1876.66 cw(c3835.96,1876.66) 3819.81,1892.81 ccw(c3835.96,1876.66) U2.12@3813.12,1876.66
P12/OLED_CS: U2.11 U4.7 | length 3707.2
  Bottom Layer w15: U2.11 3731,2021.4 3731,2800 4178,3247 6174,3247 U4.7 ; 3769.48,1982.92 cw(c3741.96,1955.4) 3780.88,1955.4 ccw(c3741.96,1955.4) 3769.48,1982.92 ; 3769.48,1982.92 ccw(c3797,2010.45) 3797,1971.52 cw(c3797,2010.45) 3769.48,1982.92
P13/FLASH_CS: R12.1 U2.10 U3.1 | length 1786.8
  Top Layer w15: v1(3880,2319) 3936,2375 4332,2375 4346,2389 U3.1 4424.5,2421.5 R12.1 ; 3907.52,2346.52 cw(c3880,2374.04) 3880,2335.12 ccw(c3880,2374.04) 3907.52,2346.52 ; 3907.52,2346.52 ccw(c3935.04,2319) 3896.12,2319 cw(c3935.04,2319) 3907.52,2346.52 ; 4346,2455.31 cw(c4361.16,2455.31) 4350.44,2466.03 ccw(c4361.16,2455.31) 4346,2455.31 ; 4346,2455.31 ccw(c4330.84,2455.31) 4341.56,2466.03 cw(c4330.84,2455.31) 4346,2455.31 ; 4448.89,2421.5 cw(c4448.89,2403.39) 4461.7,2416.2 ccw(c4448.89,2403.39) 4448.89,2421.5 ; 4448.89,2421.5 ccw(c4448.89,2439.61) 4461.7,2426.8 cw(c4448.89,2439.61) 4448.89,2421.5 ; U3.1@4346,2464.19 cw(c4346,2377.75) 4407.13,2438.87 ccw(c4346,2377.75) U3.1@4346,2464.19 ; U3.1@4346,2479.19 cw(c4346,2428.96) 4381.52,2464.48 ccw(c4346,2428.96) U3.1@4346,2479.19 ; U3.1@4346,2494.19 cw(c4346,2480.17) 4355.91,2490.09 ccw(c4346,2480.17) U3.1@4346,2494.19
  Bottom Layer w15: U2.10 3880,2117.14 v1(3880,2319) ; 3824.52,2061.66 cw(c3797,2089.19) 3797,2050.26 ccw(c3797,2089.19) 3824.52,2061.66 ; 3824.52,2061.66 ccw(c3852.04,2034.14) 3813.12,2034.14 cw(c3852.04,2034.14) 3824.52,2061.66 ; 3880,2280.08 cw(c3918.92,2280.08) 3891.4,2307.6 ccw(c3918.92,2280.08) 3880,2280.08 ; 3880,2280.08 ccw(c3841.08,2280.08) 3868.6,2307.6 cw(c3841.08,2280.08) 3880,2280.08
P14/LED3: R11.1 U2.9 | length 505.5
  Top Layer w15: U2.9 4026.62,2112.88 R11.1 ; 3835.92,2112.88 cw(c3835.92,2151.8) 3808.4,2124.28 ccw(c3835.92,2151.8) 3835.92,2112.88 ; 3835.92,2112.88 ccw(c3835.92,2073.96) 3808.4,2101.48 cw(c3835.92,2073.96) 3835.92,2112.88 ; R11.1@4082.2,2057.3 cw(c4069.39,2044.5) 4087.5,2044.5 ccw(c4069.39,2044.5) R11.1@4082.2,2057.3 ; R11.1@4082.2,2057.3 ccw(c4095,2070.11) 4095,2052 cw(c4095,2070.11) R11.1@4082.2,2057.3
P15/SCLK: U2.8 U3.6 U4.3 | length 3739.3
  Top Layer w15: U2.8 4232.62,2191.62 4249,2208 4249,2284.4 U3.6 ; 3835.92,2191.62 cw(c3835.92,2230.54) 3808.4,2203.02 ccw(c3835.92,2230.54) 3835.92,2191.62 ; 3835.92,2191.62 ccw(c3835.92,2152.7) 3808.4,2180.22 cw(c3835.92,2152.7) 3835.92,2191.62 ; 4014.58,2191.62 cw(c4014.58,2150.58) 4043.6,2179.6 ccw(c4014.58,2150.58) 4014.58,2191.62 ; 4017.58,2191.62 ccw(c4017.58,2228.42) 4043.6,2202.4 cw(c4017.58,2228.42) 4017.58,2191.62 ; v1@4066.4,2179.6 cw(c4095.42,2150.58) 4095.42,2191.62 ccw(c4095.42,2150.58) v1@4066.4,2179.6 ; v1@4066.4,2202.4 ccw(c4092.42,2228.42) 4092.42,2191.62 cw(c4092.42,2228.42) v1@4066.4,2202.4 ; U3.6@4241.56,2253.43 cw(c4223.6,2235.47) 4249,2235.47 ccw(c4223.6,2235.47) U3.6@4241.56,2253.43
  Bottom Layer w15: v1(4055,2191) 4055,2724 4379,3048 5695,3048 U4.3 ; 4055,2229.92 cw(c4016.08,2229.92) 4043.6,2202.4 ccw(c4016.08,2229.92) 4055,2229.92 ; 4055,2229.92 ccw(c4093.92,2229.92) 4066.4,2202.4 cw(c4093.92,2229.92) 4055,2229.92 ; 5796.4,3149.4 cw(c5834,3111.79) 5834,3164.97 ccw(c5834,3111.79) 5796.4,3149.4 ; 5796.4,3149.4 ccw(c5758.79,3187) 5811.97,3187 cw(c5758.79,3187) 5796.4,3149.4
P16/MOSI: U2.7 U3.5 U4.4 | length 3595.2
  Top Layer w15: U2.7 v1(4115,2270.36) 4178.96,2270.36 U3.5 ; 3835.92,2270.36 cw(c3835.92,2309.28) 3808.4,2281.76 ccw(c3835.92,2309.28) 3835.92,2270.36 ; 3835.92,2270.36 ccw(c3835.92,2231.44) 3808.4,2258.96 cw(c3835.92,2231.44) 3835.92,2270.36 ; 4076.08,2270.36 cw(c4076.08,2231.44) 4103.6,2258.96 ccw(c4076.08,2231.44) 4076.08,2270.36 ; 4076.08,2270.36 ccw(c4076.08,2309.28) 4103.6,2281.76 cw(c4076.08,2309.28) 4076.08,2270.36 ; 4153.92,2270.36 cw(c4153.92,2309.28) 4126.4,2281.76 ccw(c4153.92,2309.28) 4153.92,2270.36 ; 4153.92,2270.36 ccw(c4153.92,2231.44) 4126.4,2258.96 cw(c4153.92,2231.44) 4153.92,2270.36 ; 4150.69,2270.36 cw(c4150.69,2212.57) 4191.56,2253.43 ccw(c4150.69,2212.57) 4150.69,2270.36
  Bottom Layer w15: v1(4115,2270.36) 4115,2686 4275,2846 5593,2846 U4.4 ; 4115,2309.28 cw(c4076.08,2309.28) 4103.6,2281.76 ccw(c4076.08,2309.28) 4115,2309.28 ; 4115,2309.28 ccw(c4153.92,2309.28) 4126.4,2281.76 cw(c4153.92,2309.28) 4115,2309.28 ; 5896.4,3149.4 cw(c5934,3111.79) 5934,3164.97 ccw(c5934,3111.79) 5896.4,3149.4 ; 5896.4,3149.4 ccw(c5858.79,3187) 5911.97,3187 cw(c5858.79,3187) 5896.4,3149.4
P17/MISO: U2.6 U3.2 U4.6 | length 3210.4
  Top Layer w15: U2.6 3855.9,2408 4274,2408 4296,2430 U3.2 4296,2672 4438,2814 5761,2814 U4.6 ; 3824.52,2376.62 cw(c3797,2404.15) 3797,2365.22 ccw(c3797,2404.15) 3824.52,2376.62 ; 3824.52,2376.62 ccw(c3852.04,2349.1) 3813.12,2349.1 cw(c3852.04,2349.1) 3824.52,2376.62 ; 4296,2455.31 cw(c4311.16,2455.31) 4300.44,2466.03 ccw(c4311.16,2455.31) 4296,2455.31 ; 4296,2455.31 ccw(c4280.84,2455.31) 4291.56,2466.03 cw(c4280.84,2455.31) 4296,2455.31 ; 4296,2544.69 cw(c4280.84,2544.69) 4291.56,2533.97 ccw(c4280.84,2544.69) 4296,2544.69 ; 4296,2544.69 ccw(c4311.16,2544.69) 4300.44,2533.97 cw(c4311.16,2544.69) 4296,2544.69 ; 6096.4,3149.4 cw(c6134,3111.79) 6134,3164.97 ccw(c6134,3111.79) 6096.4,3149.4 ; 6096.4,3149.4 ccw(c6058.79,3187) 6111.97,3187 cw(c6058.79,3187) 6096.4,3149.4
P20: U2.5
P21/DD: DEBUG.2 U2.4 | length 1538.4
  Bottom Layer w15: U2.4 3940,2363.58 3940,1673 4153,1460 DEBUG.2 ; 3824.52,2479.06 cw(c3852.04,2506.58) 3813.12,2506.58 ccw(c3852.04,2506.58) 3824.52,2479.06 ; 3824.52,2479.06 ccw(c3797,2451.54) 3797,2490.46 cw(c3797,2451.54) 3824.52,2479.06 ; 4153,1458.18 cw(c4099.82,1458.18) 4137.42,1420.58 ccw(c4099.82,1458.18) 4153,1458.18 ; 4153,1458.18 ccw(c4206.18,1458.18) 4168.58,1420.58 cw(c4206.18,1458.18) 4153,1458.18
P22/DC: DEBUG.3 U2.3 | length 1658.5
  Bottom Layer w15: U2.3 3987,2395.32 3987,1671 DEBUG.3 ; 3824.52,2557.8 cw(c3852.04,2585.32) 3813.12,2585.32 ccw(c3852.04,2585.32) 3824.52,2557.8 ; 3824.52,2557.8 ccw(c3797,2530.28) 3797,2569.2 cw(c3797,2530.28) 3824.52,2557.8 ; 4215.4,1442.6 cw(c4177.79,1405) 4230.97,1405 ccw(c4177.79,1405) 4215.4,1442.6 ; 4215.4,1442.6 ccw(c4253,1480.21) 4253,1427.03 cw(c4253,1480.21) 4215.4,1442.6
VCC_IN: D1.1 J1.2 | length 290.2
  Top Layer w25: D1.1 5782.94,1494.69 5783.64,1494 J1.2@5783.64,1507.36 ; 5782.94,1570.57 cw(c5831.23,1570.57) 5797.09,1604.71 ccw(c5831.23,1570.57) 5782.94,1570.57 ; 5782.94,1570.57 ccw(c5734.66,1570.57) 5768.8,1604.71 cw(c5734.66,1570.57) 5782.94,1570.57
pads on no net: 2.2 2.3 2.4 2.6 2.7 2.8 2.9 J1.0 U1.4 U4.0 U6.3
copper on no net:
  other v2: 6256.69,1688.39 6256.69,1861.61

## Polygon pours and split planes (outlines as drawn)
GND on Top Layer "Top Layer-No Net" (solid, remove dead copper): 3695,3286 3695,1318 3701,1312 6503,1312 6503,3286 6499,3282 3695,3282
GND on Bottom Layer "Top Layer-No Net" (solid, remove dead copper): 3695,3286 3695,1312 6503,1312 6503,3282 6499,3286 3695,3286

## Keep-outs
Keep-Out Layer:
  lines w10: 3695,1312 6503,1312 6503,3255 6503,3286 3695,3286 3695,3253 3695,1312

## Silkscreen, mask and mechanical layers (free items; w line width, h text height)
Top Overlay:
  text "CC2530BB" at 4855,3116 h60
  text "OLED MODE" at 6164,2422 h30
Top Solder:
  text "OFC-6LoWPAN" at 6064,2061 h40

## Text inside footprints (layer, text, board x,y; h text height)
BT1: Top Overlay "+" at 6280.49,1429.72 h30 r180